# Altium PCB USB_PD_Sink_CYPD3177.PcbDoc
Units mm, origin at the board's own origin, x right, y up, seen from the top; angles counter-clockwise.
Board outline 35.56 x 17.78 mm, 2 copper layers (Top Layer, Bottom Layer); 33 components, 25 nets, 106 pads, 28 vias.
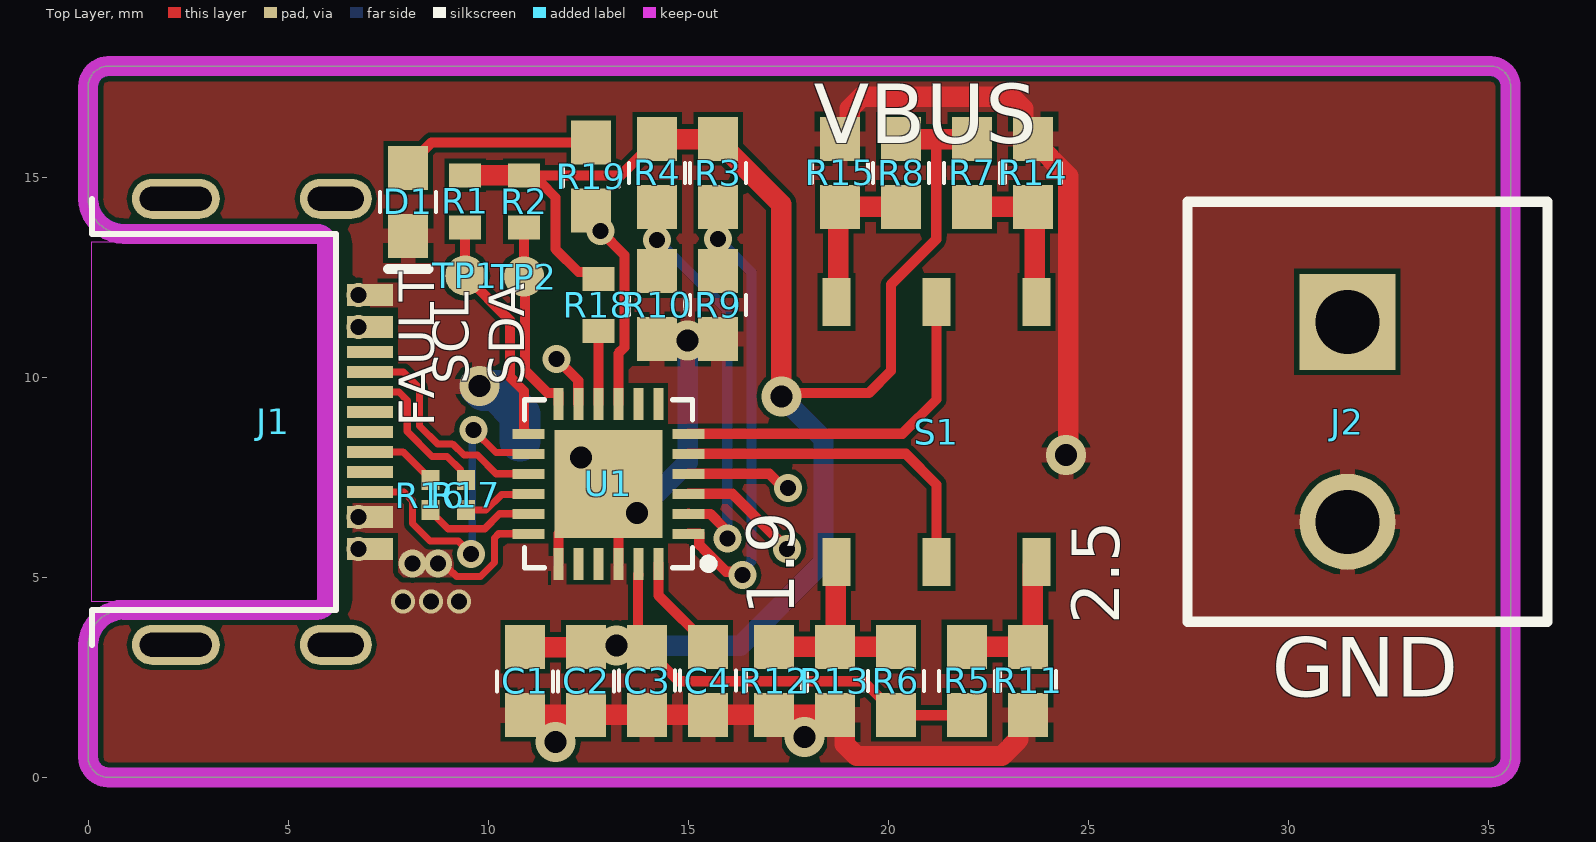
[diagram p0: Top Layer view]
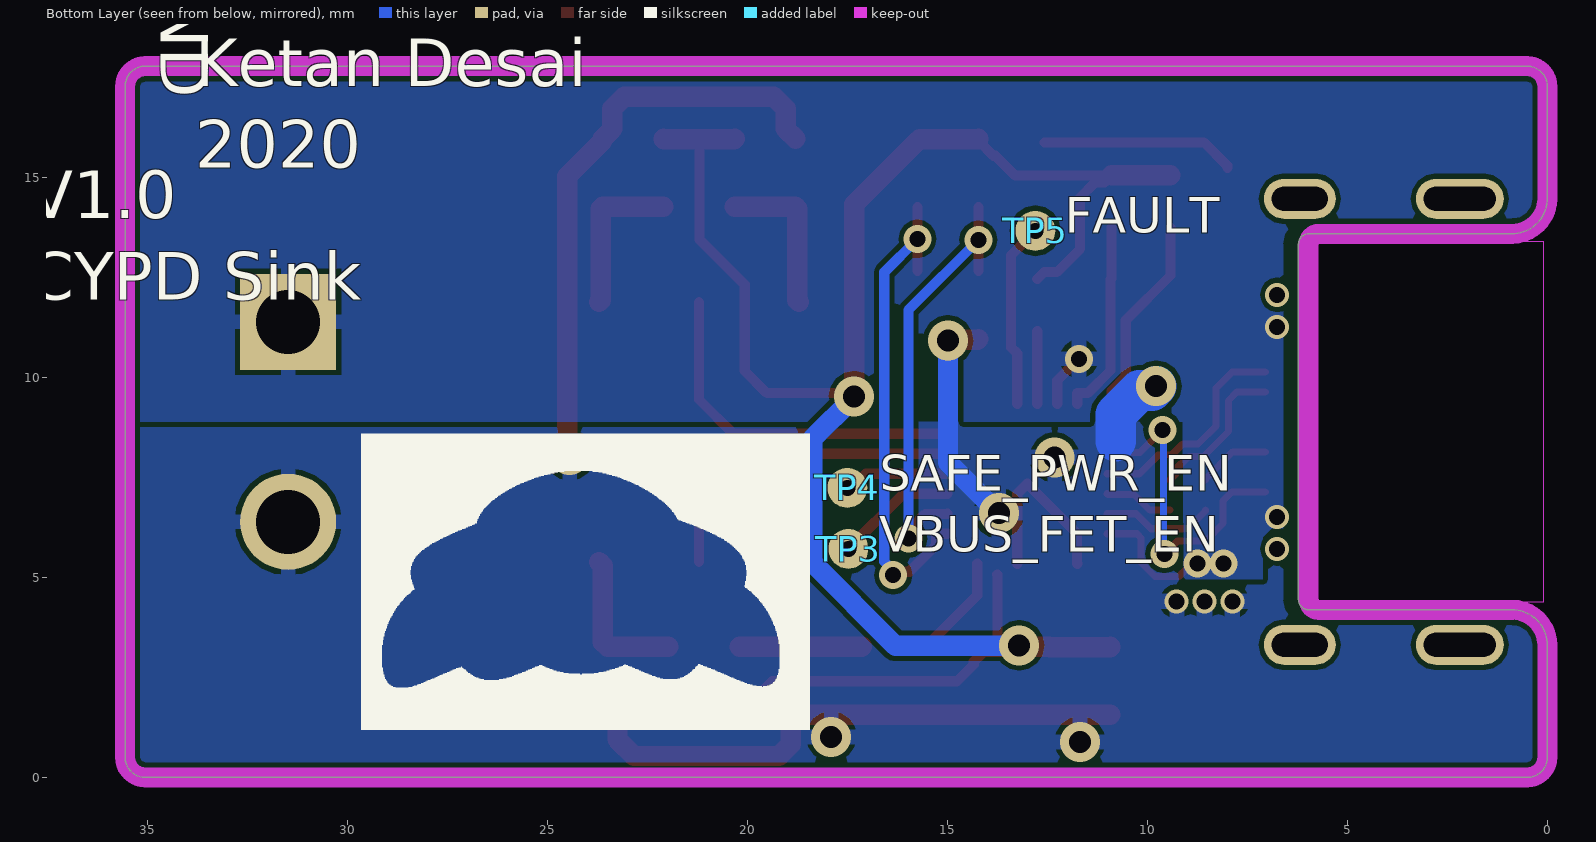
[diagram p1: Bottom Layer view, seen from below]
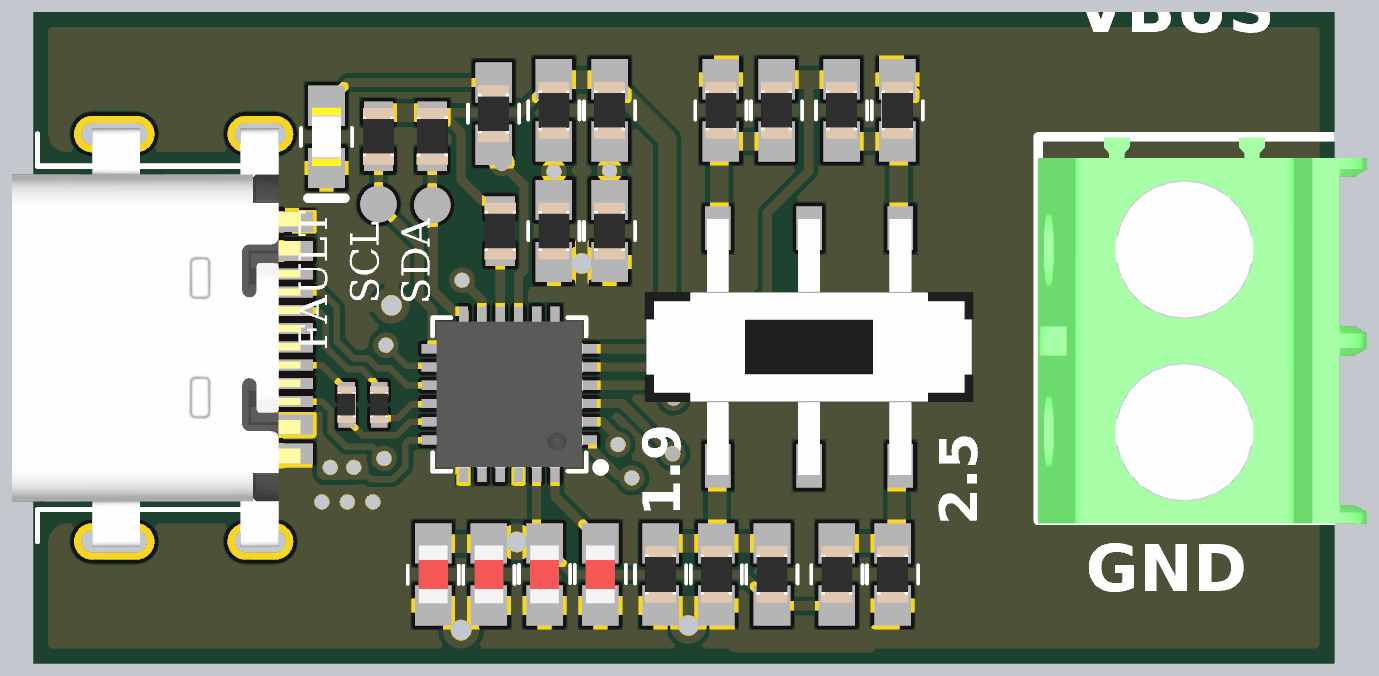
[diagram p2: 3D render of the assembled board from above, using the file's embedded part models]

## Layer stack, top to bottom
Top Solder: solder mask 0.0102, Solder Resist, Dk 3.5
Top Layer: signal copper 0.0356
Dielectric 1: dielectric 0.32, FR-4, Dk 4.8
Bottom Layer: signal copper 0.0356
Bottom Solder: solder mask 0.0102, Solder Resist, Dk 3.5

## Board outline
0,17.272 cw(c0.508,17.272) 0.508,17.78 34.798,17.78 35.052,17.78 cw(c35.052,17.272) 35.56,17.272 35.56,0.508 cw(c35.052,0.508) 35.052,0 0.508,0 cw(c0.508,0.508) 0,0.508 0,3.302 cw(c0.889,3.302) 0.889,4.191 5.969,4.191 ccw(c5.969,4.445) 6.223,4.445 6.223,13.335 ccw(c5.969,13.335) 5.969,13.589 0.889,13.589 cw(c0.889,14.478) 0,14.478

## Design rules (kind name [scope] priority, off if disabled: settings)
Clearance Clearance_3 [InNamedPolygon('VBUS_L01_P000')] p1: gap=0.127 ignorepadtopadclearanceinfootprint=FALSE
Clearance Clearance_2 [InNamedPolygon('VBUS_L01_P000')] p2: gap=0.127 ignorepadtopadclearanceinfootprint=FALSE
Clearance Clearance_1 [InNamedPolygon('VBUS_L01_P000')] p3: gap=0.254 ignorepadtopadclearanceinfootprint=FALSE except(0: Arc-Hole Track-Hole SMDPad-Hole THPad-Hole Via-Hole Fill-Hole Poly-Hole Region-Hole Text-Hole)
Clearance [All] p4: gap=0.127 ignorepadtopadclearanceinfootprint=FALSE
PolygonConnect PolygonConnect_6 [All vs IsNamedPolygon('VBUS_L02_P003')] p1: connectstyle=Direct reliefconductorwidth=0.254 reliefentries=4 polygonreliefangle="90 Angle" airgapwidth=0.254
PolygonConnect PolygonConnect_5 [All vs IsNamedPolygon('VBUS_L02_P001')] p2: connectstyle=Relief reliefconductorwidth=0.381 reliefentries=4 polygonreliefangle="90 Angle" airgapwidth=0.127
PolygonConnect PolygonConnect_4 [All vs IsNamedPolygon('GND_L02_P006')] p3: connectstyle=Relief reliefconductorwidth=0.381 reliefentries=4 polygonreliefangle="90 Angle" airgapwidth=0.127
PolygonConnect PolygonConnect_3 [All vs IsNamedPolygon('GND_L01_P007')] p4: connectstyle=Relief reliefconductorwidth=0.381 reliefentries=4 polygonreliefangle="90 Angle" airgapwidth=0.127
PolygonConnect PolygonConnect_2 [All vs IsNamedPolygon('GND_L01_P005')] p5: connectstyle=Direct reliefconductorwidth=0.254 reliefentries=4 polygonreliefangle="90 Angle" airgapwidth=0.254
PolygonConnect PolygonConnect_1 [All vs IsNamedPolygon('VBUS_L01_P000')] p6: connectstyle=Direct reliefconductorwidth=0.254 reliefentries=4 polygonreliefangle="90 Angle" airgapwidth=0.254
PolygonConnect [All] p7: connectstyle=Relief reliefconductorwidth=0.254 reliefentries=4 polygonreliefangle="90 Angle" airgapwidth=0.254
RoutingVias [All] p1: holewidth=0.711 width=1.27 viastyle="Through Hole" minholewidth=0.4 minwidth=0.5 maxholewidth=0.55 maxwidth=1
SolderMaskExpansion [All] p1: expansion=0.102 istentingtop=FALSE
Width [All] p1: maxlimit=1.016 minlimit=0.178 preferedwidth=0.254
30 further rules are at their usual default settings.

## Components (designator, comment, footprint, x,y, rotation, side; value= is the part's Value field where it differs from the comment)
C1 "C0603 100nF 25V X7R" C0603-IPC 10.922,2.413 r270 top value=100nF
C2 "C0603 100nF 25V X7R" C0603-IPC 12.446,2.413 r270 top value=100nF
C3 "C0603 1uF 10V X7R" C0603-IPC 13.97,2.413 r90 top value="1 uF"
C4 "C0603 1uF 10V X7R" C0603-IPC 15.494,2.413 r90 top value="1 uF"
D1 "LED 0603 Green" LED0603-IPC 8.001,14.39 r90 top
J1 "16 Pin Mid Mount USB C" "USB-C - 16 Pin Mid Mount" 4.191,8.89 r270 top
J2 "Phoenix Contact 1935161" Phoenix_1935161 31.48,8.89 r270 top
R1 "R0603 4.7k 1%" R0603-HIGH-DENSITY 9.423,14.402 r270 top value=4.7k
R2 "R0603 4.7k 1%" R0603-HIGH-DENSITY 10.897,14.402 r270 top value=4.7k
R3 "R0603 10K 1%" R0603-IPC 15.748,15.113 r90 top value=10k
R4 "R0603 0" R0603-IPC 14.224,15.113 r90 top value=0
R5 "R0603 10K 1%" R0603-IPC 21.971,2.413 r270 top value=10k
R6 "R0603 10K 1%" R0603-IPC 20.193,2.413 r270 top value=10k
R7 "R0603 10K 1%" R0603-IPC 22.098,15.113 r90 top value=10k
R8 "R0603 0" R0603-IPC 20.32,15.113 r90 top value=0
R9 "R0603 10K 1%" R0603-IPC 15.748,11.811 r90 top value=10k
R10 "R0603 0" R0603-IPC 14.224,11.811 r90 top value=DNI
R11 "R0603 4.7k 1%" R0603-IPC 23.495,2.413 r90 top value=4.7k
R12 "R0603 4.7k 1%" R0603-IPC 17.145,2.413 r90 top value=4.7k
R13 "R0603 4.7k 1%" R0603-IPC 18.669,2.413 r90 top value=4.7k
R14 "R0603 4.7k 1%" R0603-IPC 23.622,15.113 r270 top value=4.7k
R15 "R0603 0" R0603-IPC 18.796,15.113 r270 top value=DNI
R16 "R0402 0R" R0402-HIGH-DENSITY 8.551,7.058 r270 top value=0
R17 "R0402 0R" R0402-HIGH-DENSITY 9.44,7.058 r270 top value=0
R18 "R0603 4.7k 1%" R0603-HIGH-DENSITY 12.755,11.811 r90 top value=4.7k
R19 "R0603 1K 1%" R0603-IPC 12.573,15.025 r90 top value=1k
S1 "SS-3235S-L3" SS-3235S-L3 21.209,8.636 r180 top
TP1 "SCL" TESTPOINT_SMT 10.223,11.748 r90 top
TP2 "SDA" TESTPOINT_SMT 11.697,11.722 r90 top
TP3 "VBUS_FET_EN" TESTPOINT_SMT 16.675,4.915 r90 bottom
TP4 "SAFE_PWR_EN" TESTPOINT_SMT 16.701,6.439 r90 bottom
TP5 "FAULT" TESTPOINT_SMT 12.002,12.865 r90 bottom
U1 "CYPD3177 PD Sink Controller" "QFN24 - 4X4MM - PITCH 0.5MM - EXPOSEDPAD" 13.005,7.341 r180 top

## Footprints (in the part's own frame and the unit in brackets; to place one, negate y for a bottom-side part, rotate by r counter-clockwise, add the part's x,y. Pads: shape width x height; smd on the part's side, far side on the other; paste and mask are expansions set on the pad)
C0603-IPC [mm]
  rect 1.1x1 smd: 1(-0.85,0) 2(0.85,0)
  silkscreen extent -0.24,-0.7 0.26,0.7, body extent -0.8,-0.4 0.8,0.4, height 0.3
LED0603-IPC [mm]
  rect 1.1x1 smd: A(0.85,0) K(-0.85,0)
  silkscreen extent -1.68,-0.7 0.25,0.7, body extent -0.8,-0.4 0.8,0.4, height 1.1
Phoenix_1935161 [mm] "Phoenix Contact 1935161 2-pos terminal block"
  rect 2.4x2.4 hole 1.6: 1(-2.5,0)
  round 2.4 hole 1.6: 2(2.5,0)
  silkscreen extent -5.5,-4 5,5, body extent -5.48,-4 5.08,5, height 11.41
"QFN24 - 4X4MM - PITCH 0.5MM - EXPOSEDPAD" [mm] "QFN24 - 4X4mm - pitch 0.5mm - ExposedPAD"
  rect 2.7x2.7 smd: 0(0,0)
  rect 0.8x0.25 smd: 1(-2,1.25) 2(-2,0.75) 3(-2,0.25) 4(-2,-0.25) 5(-2,-0.75) 6(-2,-1.25) 13(2,-1.25) 14(2,-0.75) 15(2,-0.25) 16(2,0.25) 17(2,0.75) 18(2,1.25)
  rect 0.25x0.8 smd: 7(-1.25,-2) 8(-0.75,-2) 9(-0.25,-2) 10(0.25,-2) 11(0.75,-2) 12(1.25,-2) 19(1.25,2) 20(0.75,2) 21(0.25,2) 22(-0.25,2) 23(-0.75,2) 24(-1.25,2)
  silkscreen extent -2.6,-2.1 2.1,2.1, body extent -2,-2 2,2, height 1
R0402-HIGH-DENSITY [mm] "Chip Resistor, 2-Leads, Body 1.00x0.50mm, IPC High Density"
  rect 0.5x0.45 smd: 1(-0.375,0) 2(0.375,0)
  body extent -0.5,-0.25 0.5,0.26, height 0.34
R0603-HIGH-DENSITY [mm] "Chip Resistor, 2-Leads, Body 1.60x0.80mm, IPC High Density"
  rect 0.6x0.8 smd: 1(-0.65,0) 2(0.65,0)
  body extent -0.77,-0.43 0.78,0.43, height 0.44
R0603-IPC [mm]
  rect 1.1x1 smd: 1(-0.85,0) 2(0.85,0)
  silkscreen extent -0.25,-0.7 0.25,0.7, body extent -0.77,-0.43 0.78,0.43, height 0.44
SS-3235S-L3 [mm] "SWITCH TOGGLE DPDT O-O 0.05A 12V"
  rect 0.7x1.2 smd: 1(-2.5,3.25) 2(0,3.25) 3(2.5,3.25) 4(-2.5,-3.25) 5(0,-3.25) 6(2.5,-3.25)
  body extent -4.5,-3.5 4.5,3.5, height 5.65
TESTPOINT_SMT [mm]
  round 1 smd: 1(0.8,0.8)
"USB-C - 16 Pin Mid Mount" [mm] "16 Pin USB C Mid Mount"
  rect 0.3x1.15 smd: A1(-3.3,2.86) A4(-2.5,2.86) A5(-1.25,2.86) A6(-0.25,2.86) A7(0.25,2.86) A8(1.25,2.86) A9(2.5,2.86) A12(3.3,2.86) B1(3.05,2.86) B4(2.25,2.86) B5(1.75,2.86) B6(0.75,2.86) B7(-0.75,2.86) B8(-1.75,2.86) B9(-2.25,2.86) B12(-3.05,2.86)
  oval 1x1.8 hole 0.6 slot 1.4 at 90 deg: S1(-5.575,2) S2(5.575,2)
  oval 1x2.2 hole 0.6 slot 1.8 at 90 deg: S3(-5.575,-2) S4(5.575,-2)
  Keep-Out Layer region: 4.5,-4.1 -4.5,-4.1 -4.5,1.9 4.5,1.9
  silkscreen extent -5.58,-4.1 5.58,2, body extent -5.72,-4.8 5.73,3.1, height 1.82

## Part data
C1 C2: "Chip Capacitor, 0603, 100nF, 25V, X7R", Max. Voltage=25V, Supplier Part Number 1=490-1524-1-ND, EIA Code=X7R, Supplier 1=Digi-Key
C3 C4: "Chip Capacitor, 0603, 1uF +/- 0.1uF, 10V, X7R", Max. Voltage=10V, Supplier Part Number 1=1276-1946-1-ND, EIA Code=X7R, Supplier 1=Digi-Key
D1: "LED GREEN CLEAR 0603 SMD", Supplier Part Number 1=732-4971-1-ND, Supplier 1=Digi-Key
J1: library part "USB C USB 2.0 and PD", "USB-C USB 2.0 5A PD 16 Position Mid Mount", Manufacturer="Jing Extension of the Electronic Co", Supplier Part Number 1=C168688, Supplier 1=LCSC
J2: library part "Term Block 2pos", "Terminal Block, 2 Position, 5mm pitch, 18A, 300V, 12-26 AWG", Manufacturer="Phoenix Contact", Manufacturer Part Number=1935161, Supplier Part Number 1=277-1667-ND, Supplier 1=Digi-Key
R1 R2 R11 R12 R13 R14 R18: "Chip Resistor, 0603, 4.7k ohms, 0.1W", Supplier Part Number 1=311-4.70KHRCT-ND, Supplier 1=Digi-Key
R3 R5 R6 R7 R9: "RES SMD 10K OHM 1% 1/10W 0603", Supplier Part Number 1=RMCF0603FT10K0CT-ND, Supplier 1=Digi-Key
R4 R8 R10 R15: "RES SMD 0 OHM JUMPER 1/10W 0603", Supplier Part Number 1=RMCF0603ZT0R00CT-ND, Supplier 1=Digi-Key
R16 R17: "Chip Resistor, 0402, 0 ohm jumper", Supplier Part Number 1=311-0.0JRCT-ND, Supplier 1=Digi-Key
R19: "RES SMD 1K OHM 1% 1/10W 0603", Operating Temperature="-55°C ~ 155°C", Supplier Part Number 1=RMCF0603FG1K00CT-ND, Temperature Coefficient=±100ppm/°C, Tolerance=±1%, Features="Automotive AEC-Q200", Supplier 1=Digi-Key
S1: library part "Slide Switch DPDT SMD", "DPDT 50mA @ 12VDC 12V On-On SMD Toggle Switches RoHS", Manufacturer Part Number=SS-3235S-L3, Supplier 3=LCSC, Supplier Part Number 3=C381098
TP1 TP2 TP3 TP4 TP5: library part Testpoint_SMT, "SMT Test Point"
U1: library part CYPD3177, "IC USB TYPE-C PD PORT CONTROL 24QFN", Supplier Part Number 1=428-4652-ND, Supplier 1=Digi-Key, Supplier 2=Mouser, Supplier Part Number 2=727-CYPD3177-24LQXQ

## Via types
v1: diameter 0.7, hole 0.4, Top Layer to Bottom Layer, tented both sides, 9 vias
v2: diameter 1, hole 0.55, Top Layer to Bottom Layer, tented both sides, 7 vias
v3: diameter 0.6, hole 0.4, Top Layer to Bottom Layer, 4 vias
v4: diameter 0.6, hole 0.4, Top Layer to Bottom Layer, tented both sides, 3 vias
v5: diameter 0.7, hole 0.4, Top Layer to Bottom Layer, tented top, 3 vias
v6: diameter 1, hole 0.55, Top Layer to Bottom Layer, tented bottom, 2 vias

## Nets (pads, with @x,y where several pads share a name; then routed paths per layer and width w, separated by ;. In a path a pad name is that pad's centre, name@x,y a point inside that pad or via, vN(x,y) a via of type N, cw(c..) or ccw(c..) an arc to the next point about the centre after c; other vN are vias at no path point)
+3V3: C1.1 C2.1 C3.2 R1.1 R2.1 R3.2 R4.2 R5.2 R6.2 R7.2 R8.2 R18.2 U1.23 | length 52.9
  Top Layer w0.254: R18.2 12.582,12.634 12.258,12.634 11.684,13.208 11.684,14.497 11.302,14.879 11.07,14.879 R2.1 13.313,15.052 13.801,15.54 13.851,15.54 14.224,15.913 R4.2 ; U1.23@13.753,5.068 13.746,5.061 13.746,3.487 C3.2 14.343,2.89 14.343,2.823 14.761,2.404 19.384,2.404 19.803,1.986 19.82,1.986 20.193,1.613 R6.2 20.202,1.554 21.962,1.554 R5.2 ; v2(17.335,9.525) 17.417,9.608 19.514,9.608 20.066,10.16 20.066,12.319 21.2,13.453 21.2,15.954
  Top Layer w0.508: R1.1 R2.1 ; C1.1 10.931,3.254 12.437,3.254 C2.1 C3.2 ; R4.2 14.233,15.954 15.689,15.954 15.739,15.904 15.757,15.904 17.326,14.335 v2@17.326,9.534 ; R8.2 20.329,15.954 21.2,15.954 22.089,15.954 R7.2
  Bottom Layer w0.508: v2(13.208,3.302) 13.217,3.293 16.3,3.293 18.382,5.375 18.382,8.461 17.335,9.508 v2(17.335,9.525)
FAULT: R19.1 TP5.1 U1.9 | length 4.6
  Top Layer w0.254: v5(12.802,13.665) 13.409,13.058 13.409,10.756 13.255,10.602 U1.9
GND: C1.2 C2.2 C3.1 C4.1 D1.K J1.A1 J1.A12 J1.B1 J1.B12 J2.2 R9.1 R10.1 R11.1 R12.1 R13.1 R14.1 R15.1 U1.0 U1.19 U1.22 | length 40.7
  Top Layer w0.254: U1.19 11.757,5.343 11.757,6.093 U1.0 13.255,7.091 U1.22
  Top Layer w0.508: C1.2 C3.1 C4.1 R12.1 R13.1 18.915,1.317 18.915,0.831 19.213,0.533 22.835,0.533 23.249,0.948 23.249,1.317 R11.1 ; R10.1 14.244,10.941 14.967,10.941 v2(14.986,10.922) ; R15.1 19.042,16.209 19.042,16.72 19.34,17.018 23.078,17.018 23.376,16.72 23.376,16.209 R14.1 23.622,15.913 24.503,15.032 24.503,8.12 v2(24.444,8.061)
  Bottom Layer w0.508: v6(13.716,6.604) 14.986,7.874 v2(14.986,10.922)
  Bottom Layer w1.016: v2(9.779,9.779) 9.886,9.672 10.2,9.672 10.795,9.077 10.795,8.403
  other v2: 11.684,0.889 17.907,1.016
  other v3: 6.756,5.715 6.756,12.065
  other v4: 7.874,4.397 8.572,4.397 9.269,4.397
  other v6: 12.319,8.001
NetC4_2: C4.2 U1.24 | length 2.6
  Top Layer w0.254: U1.24 14.255,4.552 15.494,3.313 C4.2
NetD1_A: D1.A R19.2 | length 4.9
  Top Layer w0.254: D1.A 8.001,15.29 8.586,15.875 R19.2
NetJ1_A5: J1.A5 U1.15 | length 5.6
  Top Layer w0.178: J1.A5 7.058,10.133 7.879,10.133 8.28,9.731 8.28,8.788 8.738,8.331 9.095,8.331 9.104,8.322 9.128,8.322 9.393,8.056 9.729,8.056 10.195,7.591 U1.15
NetJ1_B5: J1.B5 U1.14 | length 8.2
  Top Layer w0.178: J1.B5 7.058,7.133 7.893,7.133 8.11,6.915 8.11,6.344 8.541,5.913 9.251,5.913 v1(9.576,5.588) ; v1(9.627,8.687) 10.191,8.123 10.973,8.123 U1.14
  Bottom Layer w0.178: v1(9.576,5.588) 9.601,5.613 9.601,8.661 v1(9.627,8.687)
NetR3_1: R3.1 R9.2 U1.1 | length 12.4
  Top Layer w0.254: U1.1 15.276,6.091 15.278,6.089 15.278,5.818 15.373,5.723 15.373,5.719 15.951,5.14 16.272,5.14 v1(16.358,5.055) ; R9.2 v1(15.748,13.462) R3.1
  Bottom Layer w0.254: v1(15.748,13.462) 16.581,12.629 16.581,5.398 16.358,5.175 v1(16.358,5.055)
NetR4_1: R4.1 R10.2 U1.2 | length 10.8
  Top Layer w0.254: R10.2 v1(14.224,13.437) R4.1 ; U1.2 15.007,6.589 15.551,6.589 v1@15.891,6.248
  Bottom Layer w0.254: v1(14.224,13.437) 15.977,11.684 v1(15.977,5.969)
NetR5_1: R5.1 R11.2 S1.1 | length 3.7
  Top Layer w0.508: R5.1 R11.2 23.613,3.381 23.613,5.29 S1.1
NetR6_1: R6.1 R12.2 R13.2 S1.3 | length 5.2
  Top Layer w0.508: R12.2 R13.2 ; S1.3 18.689,5.366 18.689,3.283 R13.2 ; R6.1 R13.2
NetR7_1: R7.1 R14.2 S1.4 | length 3.9
  Top Layer w0.508: R7.1 R14.2 23.666,14.219 23.666,11.93 S1.4
NetR8_1: R8.1 R15.2 S1.6 | length 3.9
  Top Layer w0.508: S1.6 18.752,11.93 18.752,14.219 R15.2 R8.1
NetR16_2: R16.2 U1.17 | length 2.8
  Top Layer w0.178: R16.2 8.551,6.659 8.992,6.218 9.913,6.218 10.286,6.591 U1.17
NetR17_2: R17.2 U1.16 | length 1.7
  Top Layer w0.178: R17.2 9.947,6.683 10.338,7.074 10.988,7.074 U1.16
NetR18_1: R18.1 U1.10 | length 1.8
  Top Layer w0.254: U1.10 R18.1
NetS1_2: S1.2 U1.5 | length 8.5
  Top Layer w0.254: U1.5 20.437,8.091 21.209,7.319 S1.2
NetS1_5: S1.5 U1.6 | length 9
  Top Layer w0.254: U1.6 20.351,8.591 21.209,9.449 S1.5
NetTP3_1: TP3.1 U1.3 | length 3
  Top Layer w0.254: U1.3 16.1,7.091 v5(17.475,5.715)
NetTP4_1: TP4.1 U1.4 | length 2.6
  Top Layer w0.254: U1.4 17.028,7.591 17.38,7.239 v5(17.501,7.239)
SCL: R1.2 TP1.1 U1.13 | length 5.9
  Top Layer w0.254: R1.2 TP1.1 10.541,11.43 10.541,10.016 10.897,9.66 10.897,8.593 10.899,8.591 U1.13
SDA: R2.2 TP2.1 U1.12 | length 4.9
  Top Layer w0.254: R2.2 10.897,12.481 10.922,12.455 10.922,10.173 11.482,9.614 11.753,9.614 11.755,9.612 U1.12
USB_N: J1.B7 R17.1 | length 3.8
  Top Layer w0.178: J1.B7 7.058,9.633 7.768,9.633 7.976,9.425 7.976,8.645 8.594,8.026 8.969,8.026 9.304,7.691 9.304,7.57 R17.1
USB_P: J1.B6 R16.1 | length 1.8
  Top Layer w0.178: J1.B6 7.87,8.14 8.551,7.458 R16.1
VBUS: J1.A4 J1.A9 J1.B4 J1.B9 J2.1 U1.11 U1.18 | length 4.5
  Top Layer w0.178: v1(8.746,5.343) 8.883,5.343 9.111,5.115 9.12,5.115 9.212,5.022 9.81,5.022 10.16,5.372 10.16,5.986 10.264,6.091 U1.18
  Top Layer w0.254: v1(11.709,10.465) 12.253,9.921 12.253,9.343 U1.11
  other v1: 8.103,5.343
  other v3: 6.756,6.515 6.756,11.265
pads on no net: J1.A6 J1.A7 J1.A8 J1.B8 J1.S1 J1.S2 J1.S3 J1.S4 U1.7 U1.8 U1.20 U1.21

## Polygon pours and split planes (outlines as drawn)
GND on Top Layer "GND_L01_P007" (solid, remove dead copper, pour order 7): 0,0 35.56,0 35.56,17.78 0,17.78
GND on Top Layer "GND_L01_P005" (solid, pour order 5): 7.753,6.117 7.732,6.096 6.096,6.096 6.096,4.064 6.223,3.937 9.652,3.937 9.652,4.881 9.511,5.022
no net on Top Layer "NONET_L01_P004" (solid, pour order 4): 6.375,6.117
VBUS on Top Layer "VBUS_L01_P000" (solid, pour order 0): 6.375,6.858 8.11,6.858 8.11,6.344 8.541,5.913 9.144,5.913 9.144,5.006 7.876,5.002 7.747,5.131 7.747,5.84 6.375,5.84
VBUS on Bottom Layer "VBUS_L02_P003" (solid, pour order 3): 9.09,4.999 9.044,4.953 7.112,4.953 7.112,6.003 6.892,6.223 6.35,6.223 6.223,6.35 6.223,11.684 9.017,11.684 9.144,11.557
GND on Bottom Layer "GND_L02_P006" (solid, pour order 6): 35.56,8.89 35.56,0 0,0 0,8.861 0.029,8.89
VBUS on Bottom Layer "VBUS_L02_P001" (solid, pour order 1): 0.057,8.89 0,8.89 35.56,8.89 35.56,17.78 -0.034,17.78

## Keep-outs
Keep-Out Layer:
  lines w0.5: 0,0.508 ccw(c0.508,0.508) 0.508,0 35.052,0 ccw(c35.052,0.508) 35.56,0.508 35.56,17.272 ccw(c35.052,17.272) 35.052,17.78 34.798,17.78 0.508,17.78 ccw(c0.508,17.272) 0,17.272 0,14.478 ccw(c0.889,14.478) 0.889,13.589 5.715,13.589 cw(c5.715,13.335) 5.969,13.335 5.969,4.445 cw(c5.715,4.445) 5.715,4.191 0.889,4.191 ccw(c0.889,3.302) 0,3.302 0,0.508

## Silkscreen, mask and mechanical layers (free items; w line width, h text height)
Top Overlay:
  text "VBUS" at 18.136,15.367 h2.54
  text "FAULT" at 8.954,8.763 h1.52 r90
  text "1.9" at 18.034,4.058 h2.03 r90
  text "2.5" at 26.162,3.823 h2.03 r90
  text "GND" at 29.591,1.524 h2.54
Bottom Overlay:
  region: 759 vertices and 1 holes, not listed, extent 18.441,1.192 29.655,8.59
  text "VBUS" at 35.052,25.425 h2.03 r90
  text "GND" at 35.052,20.726 h2.03 r90
  text "Ketan Desai / 2020" at 33.807,14.859 h2.03
  text "V1.0 / CYPD Sink" at 37.973,11.557 h2.03
Bottom Solder:
  drawing of 5 lines, arcs and shapes, not listed